# Altium PCB PCB1.PcbDoc
Units mil, origin at the board's own origin, x right, y up, seen from the top; angles counter-clockwise.
Board outline 6000 x 4000 mil, 2 copper layers (Top Layer, Bottom Layer); 7 components, 7 nets, 20 pads, 0 vias.
Unrouted connection lines stored in the file: 13.
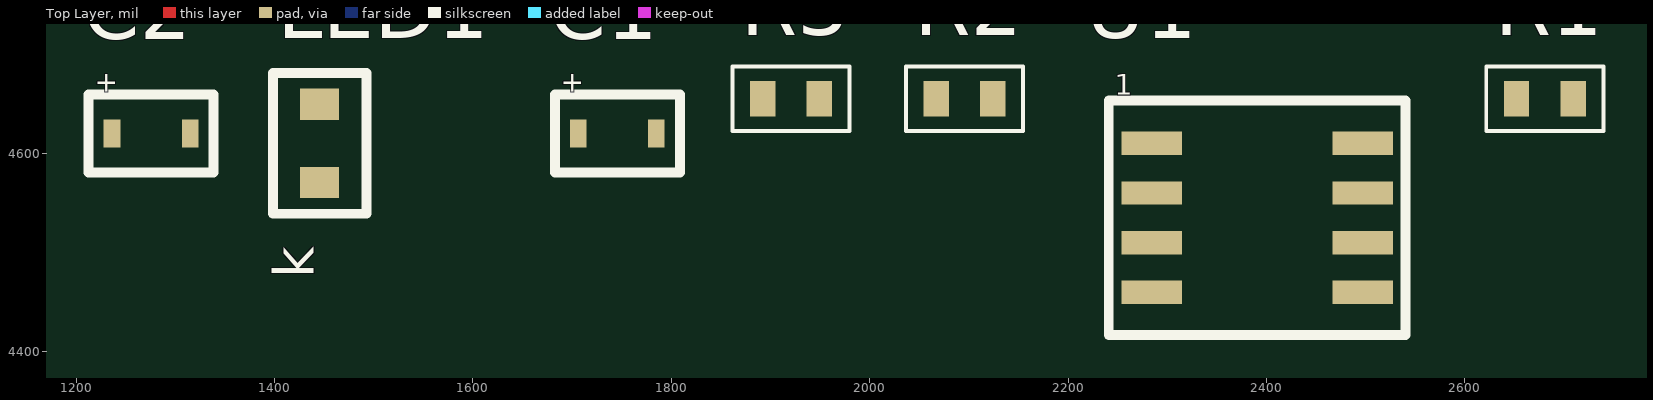
[diagram p0: Top Layer view]
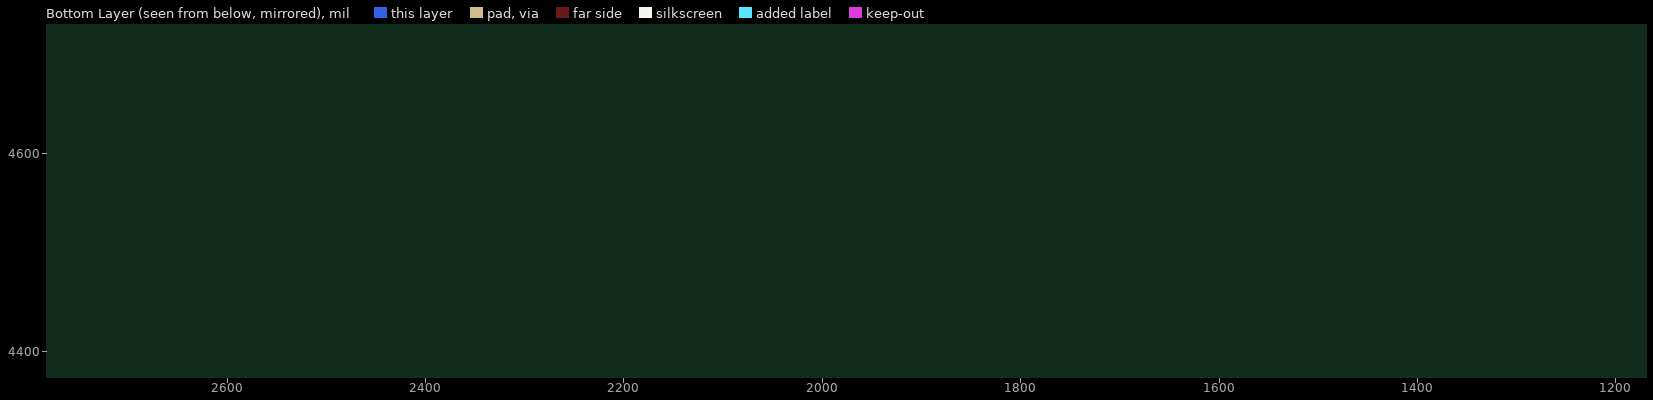
[diagram p1: Bottom Layer view, seen from below]

## Layer stack, top to bottom
Top Solder: solder mask 0.4, Solder Resist, Dk 3.5
Top Layer: signal copper 1.4
Dielectric 1: dielectric 12.6, FR-4, Dk 4.8
Bottom Layer: signal copper 1.4
Bottom Solder: solder mask 0.4, Solder Resist, Dk 3.5

## Board outline
1000,1000 7000,1000 7000,5000 1000,5000

## Design rules (kind name [scope] priority, off if disabled: settings)
Clearance [All] p1: gap=10 ignorepadtopadclearanceinfootprint=FALSE except(0: Arc-Hole Track-Hole SMDPad-Hole THPad-Hole Via-Hole Fill-Hole Poly-Hole Region-Hole Text-Hole)
PolygonConnect [All] p1: connectstyle=Relief reliefconductorwidth=10 reliefentries=4 polygonreliefangle="90 Angle" airgapwidth=10
RoomDefinition Sheet1 [InComponentClass('Sheet1')] p1: confinementstyle=ConfineIn formatcopy=TRUE lockcomponents=FALSE outline 1190.63,4385 2750.63,4385 2750.63,4795 1190.63,4795
RoutingVias [All] p1: holewidth=28 width=50 viastyle="Through Hole" minholewidth=28 minwidth=50 maxholewidth=28 maxwidth=50
SolderMaskExpansion [All] p1: expansion=4 istentingtop=FALSE
Width [All] p1: maxlimit=10 minlimit=10 preferedwidth=10
30 further rules are at their usual default settings.

## Components (designator, comment, footprint, x,y, rotation, side; value= is the part's Value field where it differs from the comment)
C1 "Capacitor_nonpol" CAPACITOR 1745.63,4620 r0 top
C2 "Capacitor_pol" CAPACITOR 1275.63,4620 r0 top
LED1 "LED" LED 1445.63,4610 r90 top
R1 "1k" restsror 2680.63,4655 r0 top
R2 "100K" restsror 2095.63,4655 r0 top
R3 "100K" restsror 1920.63,4655 r0 top
U1 "NE555" IC 2390.63,4535 r0 top

## Footprints (in the part's own frame and the unit in brackets; to place one, negate y for a bottom-side part, rotate by r counter-clockwise, add the part's x,y. Pads: shape width x height; smd on the part's side, far side on the other; paste and mask are expansions set on the pad)
CAPACITOR [mm]
  rect 0.425x0.725 smd: 1(-1,0) 2(1,0)
  silkscreen extent -1.6,-1 1.6,1, body extent -1,-0.63 1,0.63, height 0.94
IC [mm] "soic-8"
  rect 1.55x0.6 smd: 1(-2.7,1.905) 2(-2.7,0.635) 3(-2.7,-0.635) 4(-2.7,-1.905) 5(2.7,-1.905) 6(2.7,-0.635) 7(2.7,0.635) 8(2.7,1.905)
  silkscreen extent -3.8,-3 3.8,3, body extent -3,-2.45 3,2.45, height 1.75
LED [mm]
  rect 0.8x1 smd: 1(-1,0) 2(1,0)
  silkscreen extent -1.8,-1.2 1.8,1.2, body extent -0.74,-0.37 0.86,0.43
restsror [mm]
  rect 0.65x0.9 smd: 1(-0.725,0) 2(0.725,0)
  silkscreen extent -1.5,-0.82 1.5,0.82, body extent -0.8,-0.4 0.8,0.4, height 0.41

## Part data
C2: Package=0402
R1: library part 1K/0.1W, "1 kOhms ±1% 0.1W, 1/10W Chip Resistor 0603 (1608 Metric) Automotive AEC-Q200 Thick Film", Manufacturer="Stackpole Electronics Inc", Part number=RMCF0603FT1K00
R2 R3: library part 100K/0.1W

## Nets (pads, with @x,y where several pads share a name; then routed paths per layer and width w, separated by ;. In a path a pad name is that pad's centre, name@x,y a point inside that pad or via, vN(x,y) a via of type N, cw(c..) or ccw(c..) an arc to the next point about the centre after c; other vN are vias at no path point)
+5: R1.1 U1.4 U1.8
GND: C1.1 C2.2 LED1.1 U1.1
NetC1_2: C1.2 U1.5
NetC2_1: C2.1 R2.1 U1.2 U1.6
NetLED1_2: LED1.2 R3.1
NetR1_2: R1.2 R2.2 U1.7
NetR3_2: R3.2 U1.3

## Text inside footprints (layer, text, board x,y; h text height)
C1: Top Assembly "+" at 1669.02,4643.3 h20.63; Top Overlay "+" at 1688.7,4662 h20.63
C2: Top Assembly "+" at 1199.02,4643.3 h20.63; Top Overlay "+" at 1218.7,4662 h20.63
LED1: Top Assembly "k" at 1443.5,4529.45 h20.63 r90; Top Overlay "k" at 1439.57,4474.33 h40.31 r90
U1: Top Assembly "o" at 2327.35,4611.55 h20.63; Top Overlay "1" at 2247.09,4659.17 h20.63